# Altium PCB LM2587_BoostConverter.PcbDoc
Units mm, origin at the board's own origin, x right, y up, seen from the top; angles counter-clockwise.
Board outline 50 x 36 mm, 2 copper layers (Top Layer, Bottom Layer), stack 1.581 mm thick; 11 components, 7 nets, 30 pads, 81 vias.
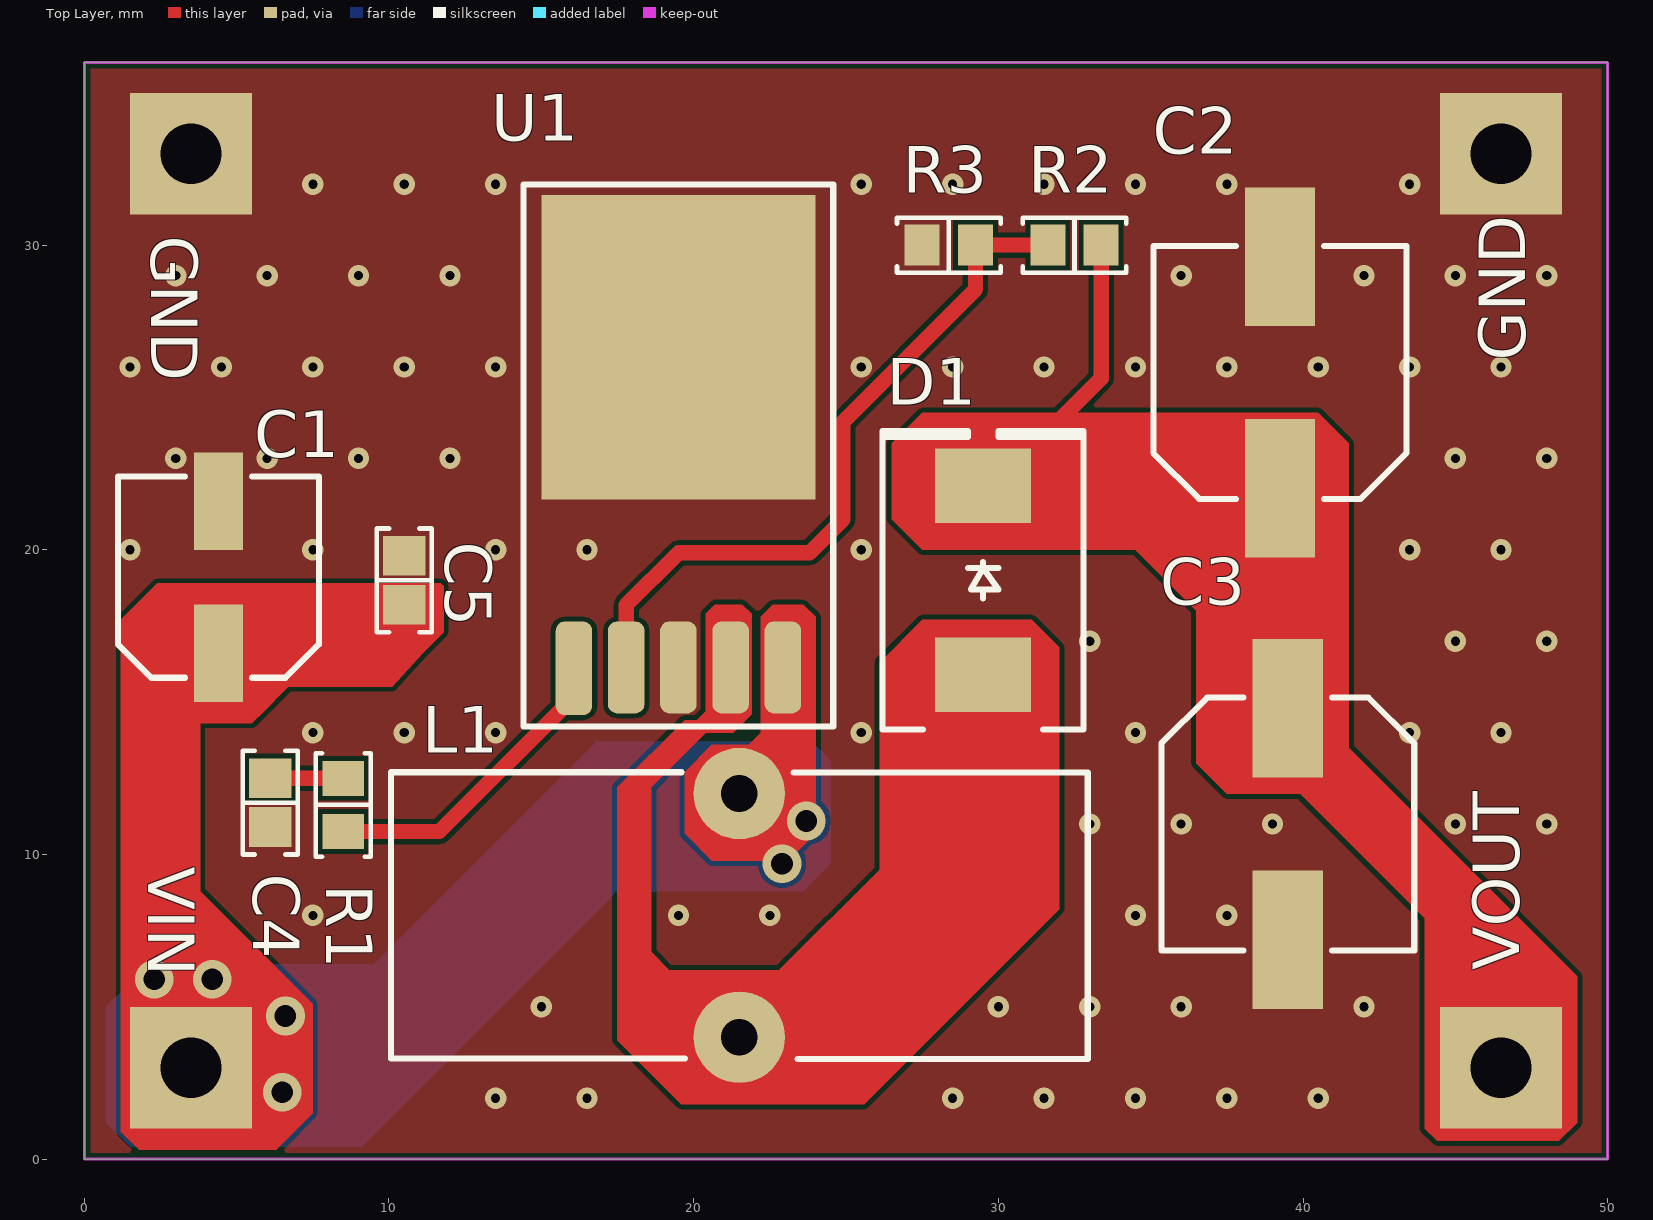
[diagram p0: Top Layer view]
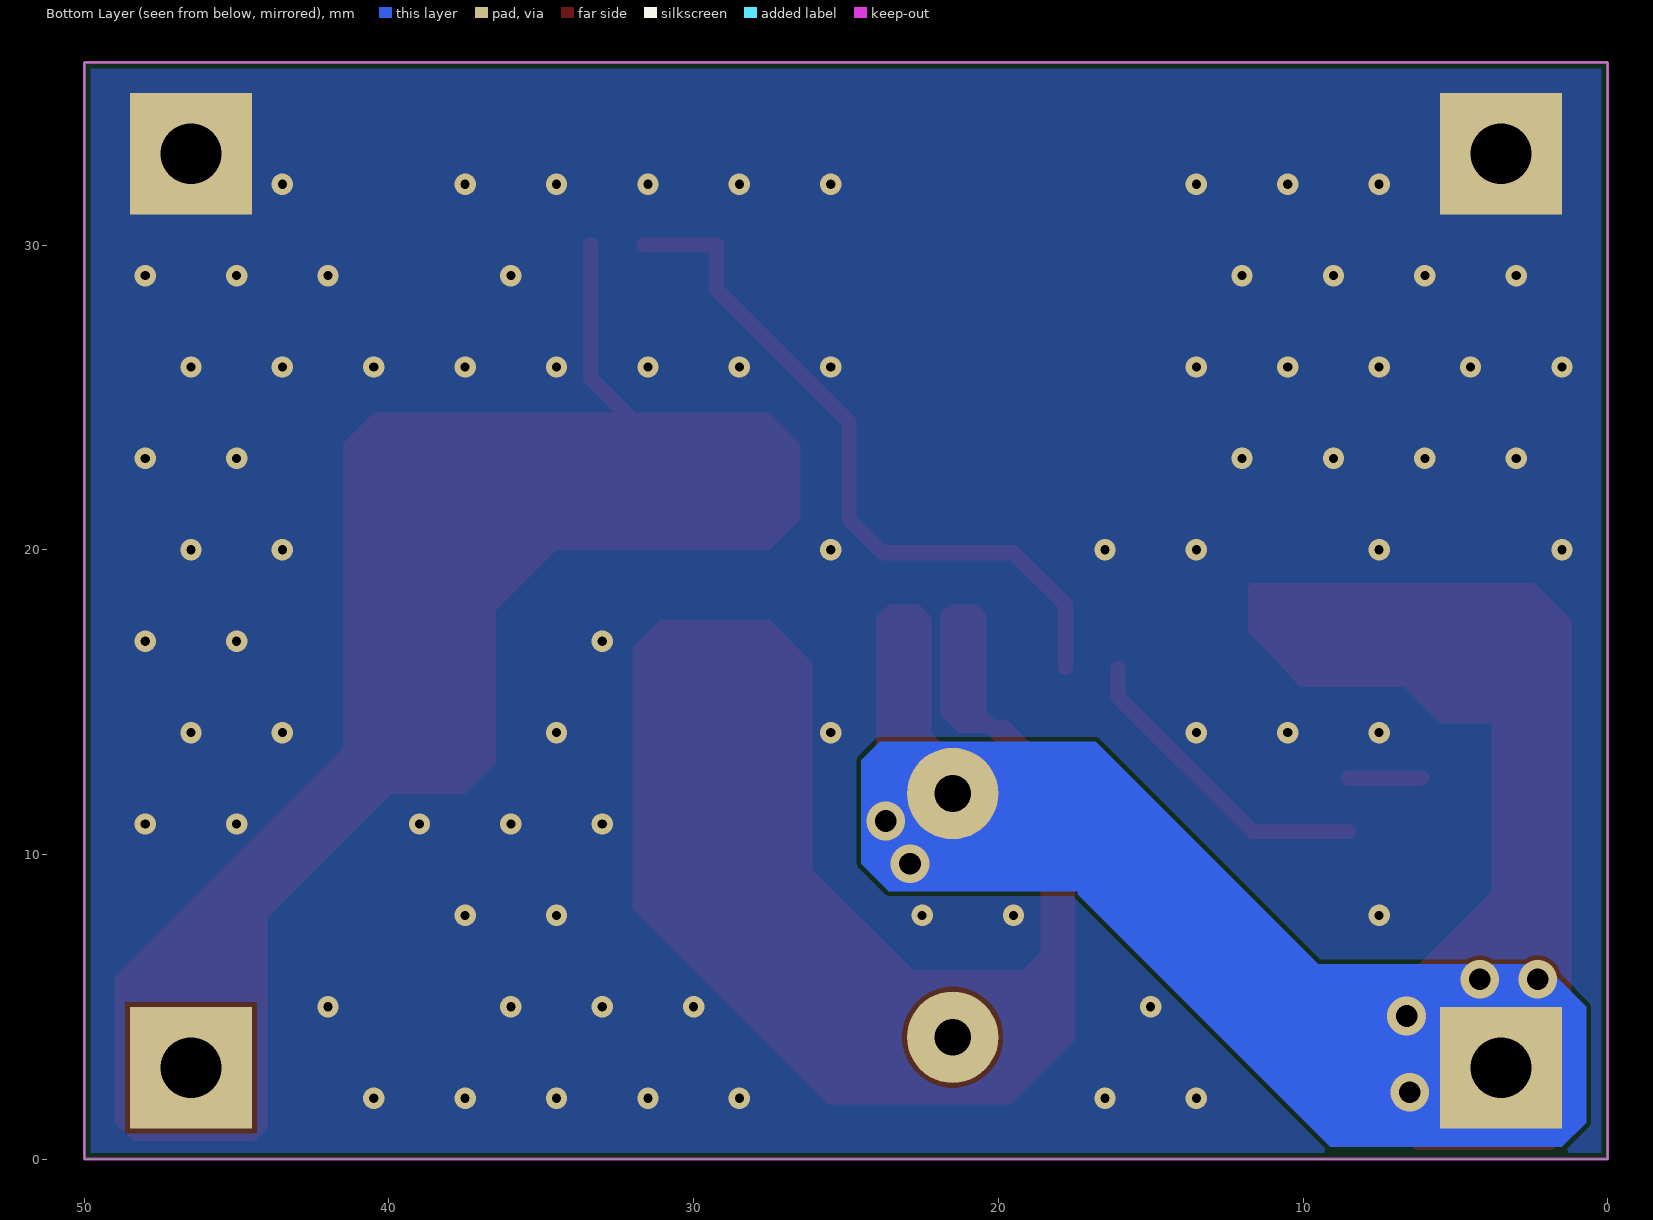
[diagram p1: Bottom Layer view, seen from below]
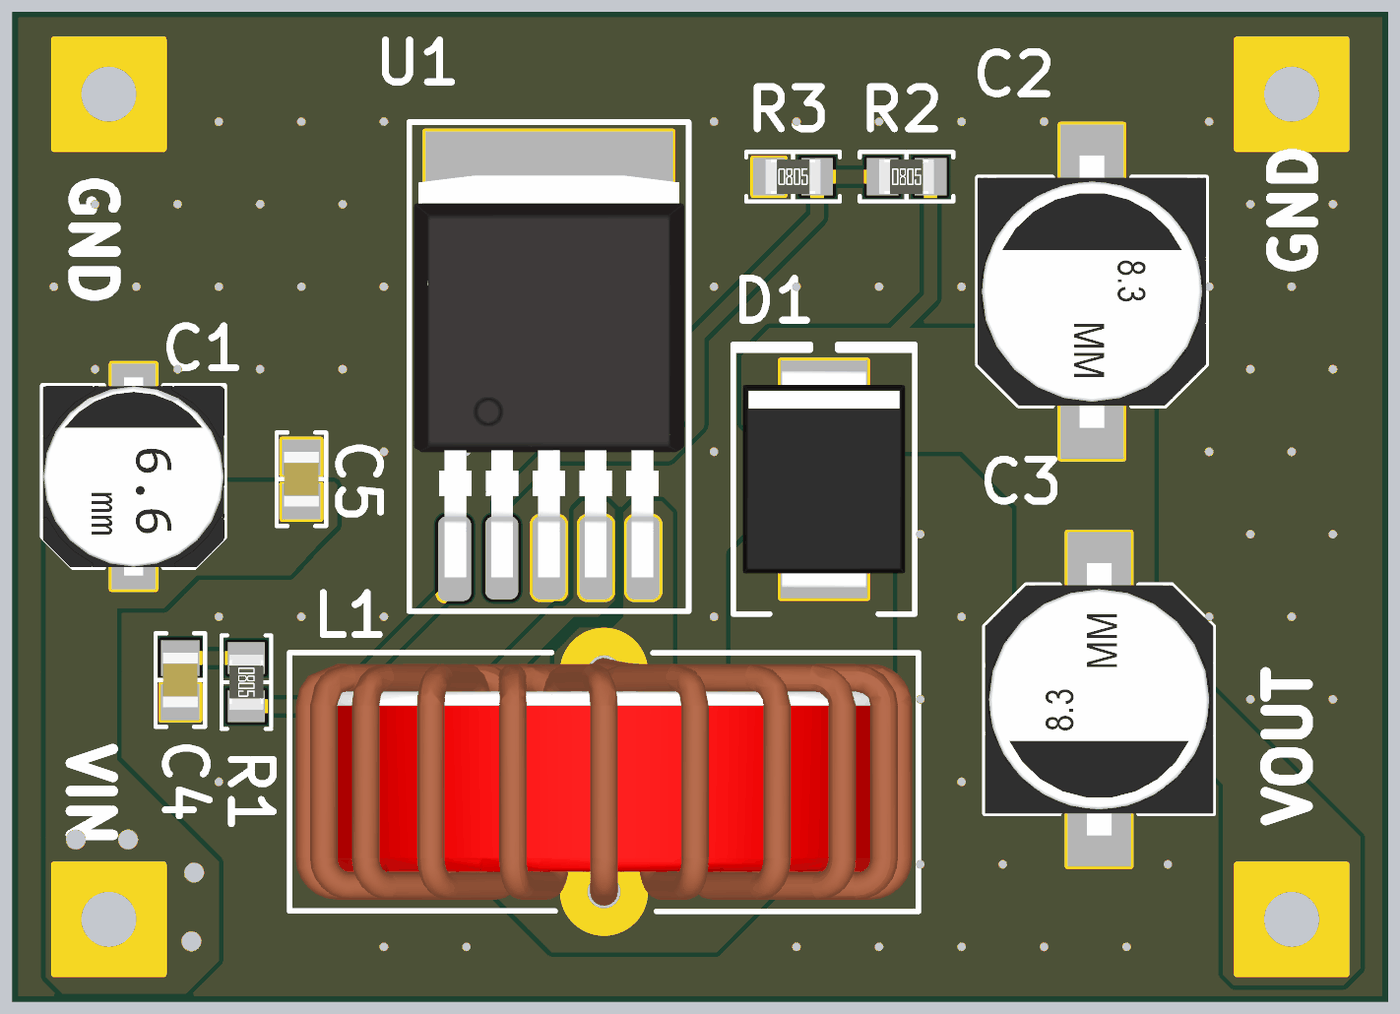
[diagram p2: 3D render of the assembled board from above, using the file's embedded part models]

## Layer stack, top to bottom
Top Solder: solder mask 0.0102, Solder Resist, Dk 3.5
Top Layer: signal copper 0.0356
Dielectric 1: dielectric 1.51, FR-4, Dk 4.8
Bottom Layer: signal copper 0.0356
Bottom Solder: solder mask 0.0102, Solder Resist, Dk 3.5

## Board outline
0,0 0,36 50,36 50,0

## Design rules (kind name [scope] priority, off if disabled: settings)
Clearance Clearance_1 [All] p1: gap=0.152 ignorepadtopadclearanceinfootprint=FALSE
Clearance [InPolygon] p2: gap=0.2 ignorepadtopadclearanceinfootprint=FALSE
PolygonConnect [All] p1: connectstyle=Direct reliefconductorwidth=0.254 reliefentries=4 polygonreliefangle="90 Angle" airgapwidth=0.254
RoutingVias [All] p1: holewidth=0.5 width=0.8 viastyle="Through Hole" minholewidth=0.3 minwidth=0.5 maxholewidth=1 maxwidth=2
SolderMaskExpansion [All] p1: expansion=0.102 istentingtop=FALSE
Width [All] p1: maxlimit=3 minlimit=0.152 preferedwidth=0.5
30 further rules are at their usual default settings.

## Components (designator, comment, footprint, x,y, rotation, side; value= is the part's Value field where it differs from the comment)
C1 "56 µF" "CAP ALSMD 6.6MM H7.7MM" 4.4,19.1 r90 top
C2 "100 µF" "CAP ALSMD 8.3MM H10.5MM" 39.242,25.821 r90 top
C3 "100 µF" "CAP ALSMD 8.3MM H10.5MM" 39.5,11 r270 top
C4 "0.68 µF" "CAP 0805_2012" 6.1,11.7 r90 top
C5 "0.1 µF" "CAP 0805_2012" 10.5,19 r270 top
D1 "SURS8360T3G" "DO214AB SMC" 29.5,19 r90 top
L1 "100µH" 7447070 21.5,8 r0 top
R1 "3 kOhms" "RES 0805_2012" 8.5,11.625 r270 top
R2 "56 kOhms" "RES 0805_2012" 32.5,30 r0 top
R3 "2 kOhms" "RES 0805_2012" 28.375,30 r0 top
U1 "Boost Converter" D2PAK 19.5,25 r0 top

## Footprints (in the part's own frame and the unit in brackets; to place one, negate y for a bottom-side part, rotate by r counter-clockwise, add the part's x,y. Pads: shape width x height; smd on the part's side, far side on the other; paste and mask are expansions set on the pad)
7447070 [mm] "0.984\" Dia x 0.433\" W (25.00mm x 11.00mm)"
  round 3 hole 1.2: 1(0,4) 2(0,-4)
  silkscreen extent -11.43,-4.71 11.43,4.7, body extent -11.21,-4.5 11.21,4.5, height 22.21
"CAP 0805_2012" [mm] "Chip Capacitor, 2-Leads, Body 2.00x1.20mm, IPC Medium Density"
  rect 1.3x1.4 smd: 1(-0.8,0) 2(0.8,0)
  silkscreen extent -1.7,-0.9 1.7,0.9, body extent -1,-0.64 1,0.64, height 1.26
"CAP ALSMD 6.6MM H7.7MM" [mm] "Aluminum Electrolytic Capacitor, Body 6.60x6.60x7.70mm, IPC Low Density"
  rect 3.2x1.6 smd: 1(-2.5,0) 2(2.5,0)
  silkscreen extent -3.3,-3.3 3.3,3.3, body extent -3.6,-3.3 3.6,3.3, height 7.7
"CAP ALSMD 8.3MM H10.5MM" [mm] "Aluminum Electrolytic Capacitor, Body 8.30x8.30x10.50mm, IPC Low Density"
  rect 4.55x2.3 smd: 1(-3.8,0) 2(3.8,0)
  silkscreen extent -4.15,-4.15 4.15,4.15, body extent -4.95,-4.15 4.95,4.15, height 10.5
D2PAK [mm]
  rrect50% 1.2x3.075 smd: 1(-3.429,-8.89)
  rrect50% 1.2x3.015 smd: 2(-1.714,-8.86) 3(0,-8.86) 4(1.714,-8.86) 5(3.429,-8.86)
  rect 9x10 smd: 3(0,1.651)
  silkscreen extent -5.08,-10.79 5.08,6.98, body extent -4.91,-9.56 4.91,5.04, height 4.22
"DO214AB SMC" [mm] "Molded Diode, 2-Leads, Body 6.85x5.90mm, IPC Medium Density"
  rect 2.45x3.15 smd: 1(-3.1,0) 2(3.1,0)
  silkscreen extent -4.9,-3.3 4.9,3.3, body extent -3.97,-2.95 3.97,2.95, height 2.6
"RES 0805_2012" [mm] "Chip Resistor, 2-Leads, Body 2.00x1.25mm, IPC Medium Density"
  rect 1.15x1.35 smd: 1(-0.875,0) 2(0.875,0)
  silkscreen extent -1.7,-0.9 1.7,0.9, body extent -1,-0.62 1,0.63, height 0.6

## Part data
C1: library part UUD1V560MCL1GS, "CAP ALUM 56UF 20% 35V SMD", Device Package="Radial, Can - SMD", Lifetime @ Temp.="2000 Hrs @ 105°C", manufacturer=Nichicon, Operating Temperature="-55°C ~ 105°C", Ratings=AEC-Q200, Ripple Current @ High Frequency="280 mA @ 100 kHz", Ripple Current @ Low Frequency="140 mA @ 120 Hz", Supplier Part Number 1=493-2288-1-ND, Tolerance=±20%, Voltage - Rated="35 V", Applications=Automotive, Capacitance="56 µF", componentlink1description=Datasheet, componentlink1url=http://nichicon-us.com/english/products/pdfs/e-uud.pdf, componentlink2description="DigiKey Link", componentlink2url=https://www.digikey.com/en/products/detail/nichicon/UUD1V560MCL1GS/590029, Height - Seated (Max)="0.303\" (7.70mm)", lastupdated="19.09.2022 14:00:49", Lifecycle Status=Active, Minimum Order=1, Mounting Type="Surface Mount", Package / Case="Radial, Can - SMD", packaging=TapeAndReel, Part Number=UUD1V560MCL1GS, Part Status=Active, partid=27263, Polarization=Polar, price=0.17, series=UUD, Size / Dimension="0.248\" Dia (6.30mm)", Supplier 1=DigiKey, Surface Mount Land Size="0.260\" L x 0.260\" W (6.60mm x 6.60mm)", Impedance="340 mOhms"
C2 C3: library part UWT1H101MNL1GS, "CAP ALUM 100UF 20% 50V SMD", Device Package="Radial, Can - SMD", Lifetime @ Temp.="1000 Hrs @ 105°C", manufacturer=Nichicon, Operating Temperature="-55°C ~ 105°C", Ripple Current @ High Frequency="210 mA @ 10 kHz", Ripple Current @ Low Frequency="140 mA @ 120 Hz", Supplier Part Number 1=493-2226-1-ND, Tolerance=±20%, Voltage - Rated="50 V", Applications="General Purpose", Capacitance="100 µF", componentlink1description=Datasheet, componentlink1url=https://products.nichicon.co.jp/en/pdf/XJA043/e-uwt.pdf, componentlink2description="DigiKey Link", componentlink2url=https://www.digikey.com/en/products/detail/nichicon/UWT1H101MNL1GS/589967, Height - Seated (Max)="0.413\" (10.50mm)", lastupdated="19.09.2022 14:00:32", Lifecycle Status=Active, Minimum Order=1, Mounting Type="Surface Mount", Package / Case="Radial, Can - SMD", packaging=TapeAndReel, Part Number=UWT1H101MNL1GS, Part Status=Active, partid=7453, Polarization=Polar, price=0.17, series=UWT, Size / Dimension="0.315\" Dia (8.00mm)", Supplier 1=DigiKey, Surface Mount Land Size="0.327\" L x 0.327\" W (8.30mm x 8.30mm)"
C4: library part CGA4J3X7R1H684K125AB, "CAP CER 0.68UF 50V X7R 0805", Device Package="0805 (2012 Metric)", manufacturer="TDK Corporation", Operating Temperature="-55°C ~ 125°C", Ratings=AEC-Q200, Supplier Part Number 1=445-6960-1-ND, Temperature Coefficient=X7R, Tolerance=±10%, Voltage - Rated=50V, Applications=Automotive, Capacitance="0.68 µF", componentlink1description=Datasheet, componentlink1url=https://product.tdk.com/info/en/catalog/datasheets/mlcc_automotive_general_en.pdf?ref_disty=digikey, componentlink2description="DigiKey Link", componentlink2url=https://www.digikey.com/en/products/detail/tdk-corporation/CGA4J3X7R1H684K125AB/2672853, lastupdated="19.09.2022 13:04:00", Lifecycle Status=Active, Minimum Order=1, Mounting Type="Surface Mount, MLCC", Package / Case="0805 (2012 Metric)", packaging=TapeAndReel, Part Number=CGA4J3X7R1H684K125AB, Part Status=Active, partid=13295, price=0.08, series=CGA, Size / Dimension="0.079\" L x 0.049\" W (2.00mm x 1.25mm)", Supplier 1=DigiKey, Thickness (Max)="0.057\" (1.45mm)"
C5: library part CC0805MRX7R9BB104, "CAP CER 0.1UF 50V X7R 0805", Device Package="0805 (2012 Metric)", manufacturer=Yageo, Operating Temperature="-55°C ~ 125°C", Supplier Part Number 1=311-4351-1-ND, Temperature Coefficient=X7R, Tolerance=±20%, Voltage - Rated=50V, Applications="General Purpose", Capacitance="0.1 µF", componentlink1description=Datasheet, componentlink1url=https://www.yageo.com/upload/media/product/productsearch/datasheet/mlcc/UPY-GPHC_X7R_6.3V-to-50V_18.pdf, componentlink2description="DigiKey Link", componentlink2url=https://www.digikey.com/en/products/detail/yageo/CC0805MRX7R9BB104/5884281, lastupdated="19.09.2022 13:04:26", Lifecycle Status=Active, Minimum Order=1, Mounting Type="Surface Mount, MLCC", Package / Case="0805 (2012 Metric)", packaging=TapeAndReel, Part Number=CC0805MRX7R9BB104, Part Status=Active, partid=2475, price=0.02, series=CC, Size / Dimension="0.079\" L x 0.049\" W (2.00mm x 1.25mm)", Supplier 1=DigiKey, Thickness (Max)="0.037\" (0.95mm)"
D1: "DIODE GEN PURP 600V 3A SMC", Current - Average Rectified (Io)=3A, Current - Reverse Leakage @ Vr="10µA @ 600V", manufacturer="ON Semiconductor", Operating Temperature - Junction="-65°C ~ 175°C", Package / Case="DO-214AB, SMC", Supplier Device Package=SMC, Supplier Part Number 1=SURS8360T3GOSCT-ND, Voltage - DC Reverse (Vr) (Max)=600V, Voltage - Forward (Vf) (Max) @ If="1.25V @ 3A", componentlink1description=Datasheet, componentlink1url=http://www.onsemi.com/pub/Collateral/MURS320T3-D.PDF, componentlink2description="DigiKey Link", componentlink2url=http://digikey.com/product-detail/en/on-semiconductor/SURS8360T3G/SURS8360T3GOSCT-ND/9087771, Diode Type=Standard, lastupdated="19.09.2022 13:45:55", Lifecycle Status=Active, Minimum Order=1, Mounting Type="Surface Mount", packaging=TapeAndReel, Part Number=SURS8360T3G, Part Status=Active, partid=348, price=0.30, Reverse Recovery Time (trr)=75ns, series=-, Speed="Fast Recovery =< 500ns, > 200mA (Io)", Supplier 1=DigiKey
L1: library part CB2016T101KV, "FIXED IND 100UH 170MA 5.85 OHM", Current - Saturation=70mA, Current Rating (Amps)=90mA, DC Resistance (DCR)="5.85Ohm Max", Device Package="0806 (2016 Metric)", Frequency - Self Resonant=8MHz, manufacturer="Taiyo Yuden", Operating Temperature="-40°C ~ 105°C", Supplier Part Number 1=587-3680-1-ND, Tolerance=±10%, Inductance Frequency - Test=796kHz, componentlink1description=Datasheet, componentlink1url="https://ds.yuden.co.jp/TYCOMPAS/ut/detail?pn=CB2016T101KV  &u=M", componentlink2description="DigiKey Link", componentlink2url=http://digikey.com/product-detail/en/taiyo-yuden/CB2016T101KV/587-3680-1-ND/4694189, Height - Seated (Max)="0.071\" (1.80mm)", lastupdated="19.09.2022 13:59:35", Lifecycle Status=Active, Material - Core=Ferrite, Minimum Order=1, Mounting Type="Surface Mount", Package / Case="0806 (2016 Metric)", packaging=TapeAndReel, Part Number=CB2016T101KV, Part Status=Active, partid=2807, price=0.10, series=CB, Shielding=Unshielded, Size / Dimension="0.079\" L x 0.063\" W (2.00mm x 1.60mm)", Supplier 1=DigiKey, Supplier Device Package="0806 (2016 Metric)", Type=Wirewound, Inductance=100µH
R1: library part ERJ-6ENF3001V, "RES SMD 3K OHM 1% 1/8W 0805", Device Package="0805 (2012 Metric)", manufacturer="Panasonic Electronic Components", Operating Temperature="-55°C ~ 155°C", Power (Watts)="0.125W, 1/8W", Ratings=AEC-Q200, Supplier Device Package=0805, Supplier Part Number 1=P3.0KCCT-ND, Temperature Coefficient=±100ppm/°C, Tolerance=±1%, componentlink1description=Datasheet, componentlink1url=https://industrial.panasonic.com/cdbs/www-data/pdf/RDA0000/AOA0000C304.pdf, componentlink2description="DigiKey Link", componentlink2url=https://www.digikey.com/en/products/detail/panasonic-electronic-components/ERJ-6ENF3001V/366038, Composition="Thick Film", Features="Automotive AEC-Q200", Height - Seated (Max)="0.028\" (0.70mm)", lastupdated="19.09.2022 13:36:50", Lifecycle Status=Active, Minimum Order=1, Number of Terminations=2, Package / Case="0805 (2012 Metric)", packaging=TapeAndReel, Part Number=ERJ-6ENF3001V, Part Status=Active, partid=30109, price=0.01, Resistance="3 kOhms", series=ERJ-6EN, Size / Dimension="0.079\" L x 0.049\" W (2.00mm x 1.25mm)", Supplier 1=DigiKey
R2: library part CRGP0805F56K, "RES 56K OHM 1% 1/3W 0805", Device Package="0805 (2012 Metric)", manufacturer="TE Connectivity Passive Product", Operating Temperature="-55°C ~ 155°C", Power (Watts)="0.333W, 1/3W", Supplier Device Package=0805, Supplier Part Number 1=A130498CT-ND, Temperature Coefficient=±100ppm/°C, Tolerance=±1%, componentlink1description=Datasheet, componentlink1url=https://www.te.com/commerce/DocumentDelivery/DDEController?Action=srchrtrv&DocNm=9-1773463-9&DocType=DS&DocLang=English, componentlink2description="DigiKey Link", componentlink2url=https://www.digikey.com/en/products/detail/te-connectivity-passive-product/CRGP0805F56K/8577100, Composition="Thick Film", Features="Pulse Withstanding", Height - Seated (Max)="0.026\" (0.65mm)", lastupdated="19.09.2022 13:36:56", Lifecycle Status=Active, Minimum Order=1, Number of Terminations=2, Package / Case="0805 (2012 Metric)", packaging=TapeAndReel, Part Number=CRGP0805F56K, Part Status=Active, partid=28743, price=0.03, Resistance="56 kOhms", series=CRGP, Size / Dimension="0.079\" L x 0.049\" W (2.00mm x 1.25mm)", Supplier 1=DigiKey
R3: library part RCS08052K00FKEA, "RES SMD 2K OHM 1% 0.4W 0805", Device Package="0805 (2012 Metric)", manufacturer="Vishay Dale", Operating Temperature="-55°C ~ 155°C", Power (Watts)="0.4W, 2/5W", Ratings=AEC-Q200, Supplier Device Package=0805, Supplier Part Number 1=541-2840-1-ND, Temperature Coefficient=±100ppm/°C, Tolerance=±1%, componentlink1description=Datasheet, componentlink1url=http://www.vishay.com/docs/20065/rcse3.pdf, componentlink2description="DigiKey Link", componentlink2url=https://www.digikey.com/en/products/detail/vishay-dale/RCS08052K00FKEA/5866986, Composition="Thick Film", Features="Automotive AEC-Q200, Pulse Withstanding", Height - Seated (Max)="0.020\" (0.50mm)", lastupdated="19.09.2022 13:36:59", Lifecycle Status=Active, Minimum Order=1, Number of Terminations=2, Package / Case="0805 (2012 Metric)", packaging=TapeAndReel, Part Number=RCS08052K00FKEA, Part Status=Active, partid=27786, price=0.03, Resistance="2 kOhms", series="RCS e3", Size / Dimension="0.079\" L x 0.049\" W (2.00mm x 1.25mm)", Supplier 1=DigiKey
U1: library part LM2587

## Free pads (board coordinates)
  rect 4x4 hole 2: GND(3.5,33) GND(46.5,33) VIN(3.5,3) VOUT(46.5,3)

## Via types
v1: diameter 0.7, hole 0.3, Top Layer to Bottom Layer, tented both sides, 75 vias
v2: diameter 1.27, hole 0.711, Top Layer to Bottom Layer, tented both sides, 6 vias

## Nets (pads, with @x,y where several pads share a name; then routed paths per layer and width w, separated by ;. In a path a pad name is that pad's centre, name@x,y a point inside that pad or via, vN(x,y) a via of type N, cw(c..) or ccw(c..) an arc to the next point about the centre after c; other vN are vias at no path point)
GND: C1.2 C2.2 C3.2 C4.1 C5.1 pad.GND R3.1 U1.3
  other v1: 13.5,2 16.5,2 28.5,2 31.5,2 34.5,2 37.5,2 40.5,2 15,5 30,5 33,5 36,5 42,5 7.5,8 19.5,8 22.5,8 34.5,8 37.5,8 33,11 36,11 39,11 45,11 48,11 7.5,14 10.5,14 13.5,14 25.5,14 34.5,14 43.5,14 46.5,14 33,17 45,17 48,17 1.5,20 7.5,20 13.5,20 16.5,20 25.5,20 43.5,20 46.5,20 3,23 6,23 9,23 12,23 45,23 48,23 1.5,26 4.5,26 7.5,26 10.5,26 13.5,26 25.5,26 28.5,26 31.5,26 34.5,26 37.5,26 40.5,26 43.5,26 46.5,26 3,29 6,29 9,29 12,29 36,29 42,29 45,29 48,29 7.5,32 10.5,32 13.5,32 25.5,32 28.5,32 31.5,32 34.5,32 37.5,32 43.5,32
NetC4_2: C4.2 R1.1 | length 2.4
  Top Layer w0.5: C4.2 R1.1
NetD1_1: D1.1 L1.2 U1.4
NetR1_2: R1.2 U1.1 | length 10.3
  Top Layer w0.5: R1.2 11.649,10.75 16.071,15.172 U1.1
NetR2_1: R2.1 R3.2 U1.2 | length 23.5
  Top Layer w0.5: U1.2 17.786,18.186 19.5,19.9 23.8,19.9 24.9,21 24.9,24.2 29.25,28.55 R3.2 R2.1
VIN: C1.1 C5.2 L1.1 pad.VIN U1.5
  other v2: 6.5,2.2 6.6,4.7 2.3,5.9 4.2,5.9 22.9,9.7 23.7,11.1
VOUT: C2.1 C3.1 D1.2 pad.VOUT R2.2 | length 9.7
  Top Layer w0.5: D1.2 29.85,22.1 33.375,25.625 R2.2

## Polygon pours and split planes (outlines as drawn)
GND on Bottom Layer "GND" (solid, pour order 0): 0,36 50,36 50,0 0,0
GND on Top Layer "GND" (solid, pour order 1): 0,36 50,36 50,0 0,0

## Keep-outs
Keep-Out Layer:
  the board outline again, w0.1

## Other copper
Top Layer:
  region net VIN: 4.99,18.9 9.3,18.9 11.7,18.9 11.8,18.8 11.8,17.3 11.1,16.6 10.1,15.5 6.7,15.5 5.824,14.624
  region net VOUT: 41.35,13.65 49,6 49,1.2 48.4,0.6 44.4,0.6 44,1 44,7.9 39.8,12.1
  region net VIN: 5,18.9 5.9,18 5.9,14.7 5.5,14.3 3.8,14.3 3.8,8.8 7.5,5.1 7.5,1.5 6.3,0.3 1.8,0.3 1.2,0.9 1.2,17.7 2.4,18.9
  region net NetD1_1: 21.6,18.2 21.9,17.9 21.9,14.6 21.3,14 20.4,14 18.6,12.2 18.6,6.8 19.2,6.2 22.8,6.2 26.1,9.5 26.1,16.3 27.5,17.7 31.1,17.7 32,16.8 32,8.2 25.6,1.8 19.6,1.8 17.5,3.9 17.5,12.2 19.7,14.4 20.1,14.4 20.4,14.7 20.4,17.9 20.7,18.2
  region net VIN: 22.6,18.2 23.6,18.2 24,17.8 24,10.7 23.1,9.8 20.6,9.8 19.7,10.7 19.7,12.7 20.6,13.6 21.8,13.6 22.2,14 22.2,17.8
  region net VOUT: 26.5,21 26.5,23.5 27.5,24.5 40.5,24.5 41.5,23.5 41.5,13 40.5,12 37.5,12 36.5,13 36.5,18 34.5,20 27.5,20
Bottom Layer:
  region net VIN: 0.7,5 2.1,6.4 9.5,6.4 16.8,13.7 23.9,13.7 24.5,13.1 24.5,9.7 23.6,8.8 17.4,8.8 17.4,8.7 9.1,0.4 1.5,0.4 0.7,1.2 0.7,4.9

## Silkscreen, mask and mechanical layers (free items; w line width, h text height)
Top Overlay:
  text "GND" at 2.2,30.3 h1.52 r270
  text "GND" at 47.3,26.2 h1.52 r90
  text "VIN" at 2.1,9.6 h1.52 r270
  text "VOUT" at 47.1,6.2 h1.52 r90